# EAGLE board DeviceDIn24 (EAGLE 5.00)

Size 160 x 100 mm. Coordinates in mm from the lower left corner, seen from the top.
Outline: 0,0 160,0 160,100 0,100 0,0
Copper layers (1*16): Top 0.035mm / dielectric 1.5mm / Bottom 0.035mm
Design rules "default": minimum track width 10mil, minimum drill 24mil, track to track 8mil, track to pad 8mil, pad to pad 8mil, via to via 8mil, smd to smd 8mil, copper to edge 40mil, drill to drill 8mil, minimum pad ring 10mil, minimum via ring 8mil, stop-mask expansion 4mil, vias tented up to drill 0mil, thermal gap 10mil

## Footprints (pad centres in the part's own frame; a part is rotated, then mirrored left to right if it is on the bottom)
C2.5-2 = drill 0.813 pad 1.6 octagon: 1 -1.27,0; 2 1.27,0
DIL40 = drill 0.813 long: 1 -24.13,-7.62; 2 -21.59,-7.62; 3 -19.05,-7.62; 4 -16.51,-7.62; 5 -13.97,-7.62; 6 -11.43,-7.62; 7 -8.89,-7.62; 8 -6.35,-7.62; 9 -3.81,-7.62; 10 -1.27,-7.62; 11 1.27,-7.62; 12 3.81,-7.62; 13 6.35,-7.62; 14 8.89,-7.62; 15 11.43,-7.62; 16 13.97,-7.62; 17 16.51,-7.62; 18 19.05,-7.62; 19 21.59,-7.62; 20 24.13,-7.62; 21 24.13,7.62; 22 21.59,7.62; 23 19.05,7.62; 24 16.51,7.62; 25 13.97,7.62; 26 11.43,7.62; 27 8.89,7.62; 28 6.35,7.62; 29 3.81,7.62; 30 1.27,7.62; 31 -1.27,7.62; 32 -3.81,7.62; 33 -6.35,7.62; 34 -8.89,7.62; 35 -11.43,7.62; 36 -13.97,7.62; 37 -16.51,7.62; 38 -19.05,7.62; 39 -21.59,7.62; 40 -24.13,7.62
DIL8 = drill 0.813 long: 1 -3.81,-3.81; 2 -1.27,-3.81; 3 1.27,-3.81; 4 3.81,-3.81; 5 3.81,3.81; 6 1.27,3.81; 7 -1.27,3.81; 8 -3.81,3.81
215876-6 = drill 0.889 round: 1 -1.905,6.35; 2 -0.635,8.89; 3 0.635,6.35; 4 1.905,8.89 | hole 3.251: -5.08,0; 5.08,0
LED3MM = drill 0.813 octagon: A -1.27,0; K 1.27,0
2,15/1,0 = drill 1.016 pad 2.159 octagon: 1 0,0
HC49U70 = drill 0.813 round: 1 -2.413,0; 2 2.413,0
0204V = drill 0.813 octagon: 1 -1.27,0; 2 1.27,0
0204/5 = drill 0.813 octagon: 1 -2.54,0; 2 2.54,0
MOLEX-1X6 = drill 1.016 pad 1.88 square: 1 0,0 | drill 1.016 pad 1.88 round: 2 2.54,0; 3 5.08,0; 4 7.62,0; 5 10.16,0; 6 12.7,0
DIL18 = drill 0.813 long: 1 -10.16,-3.81; 2 -7.62,-3.81; 3 -5.08,-3.81; 4 -2.54,-3.81; 5 0,-3.81; 6 2.54,-3.81; 7 5.08,-3.81; 8 7.62,-3.81; 9 10.16,-3.81; 10 10.16,3.81; 11 7.62,3.81; 12 5.08,3.81; 13 2.54,3.81; 14 0,3.81; 15 -2.54,3.81; 16 -5.08,3.81; 17 -7.62,3.81; 18 -10.16,3.81

## Placement (x,y rotation side)
C1  [C2.5-2]  -70.49,53.81 0 top  (outside the outline)
C2  [C2.5-2]  -75.57,53.81 0 top  (outside the outline)
IC1  PIC16F874P  [DIL40]  -38.74,10.63 0 top  (outside the outline)
IC2  PIC12F629P  [DIL8]  -20.96,27.14 0 top  (outside the outline)
J1  [215876-6]  -36.2,28.41 0 top  (outside the outline)
LED1  [LED3MM]  -19.69,67.78 0 top  (outside the outline)
LED2  [LED3MM]  -29.85,67.78 0 top  (outside the outline)
PAD1  [2,15/1,0]  -61.6,76.67 0 top  (outside the outline)
PAD2  [2,15/1,0]  -67.95,76.67 0 top  (outside the outline)
PAD3  [2,15/1,0]  -74.3,76.67 0 top  (outside the outline)
PAD4  [2,15/1,0]  -17.15,81.75 0 top  (outside the outline)
PAD5  [2,15/1,0]  -23.5,81.75 0 top  (outside the outline)
PAD6  [2,15/1,0]  -29.85,81.75 0 top  (outside the outline)
PAD7  [2,15/1,0]  -36.2,81.75 0 top  (outside the outline)
PAD8  [2,15/1,0]  -42.55,81.75 0 top  (outside the outline)
PAD9  [2,15/1,0]  -48.9,81.75 0 top  (outside the outline)
PAD10  [2,15/1,0]  -37.47,66.51 0 top  (outside the outline)
PAD11  [2,15/1,0]  -55.25,76.67 0 top  (outside the outline)
PAD12  [2,15/1,0]  -45.09,66.51 0 top  (outside the outline)
PAD13  [2,15/1,0]  -52.71,66.51 0 top  (outside the outline)
PAD14  [2,15/1,0]  -60.33,66.51 0 top  (outside the outline)
PAD15  [2,15/1,0]  -22.23,-144.31 0 top  (outside the outline)
PAD16  [2,15/1,0]  -22.23,-188.76 0 top  (outside the outline)
PAD17  [2,15/1,0]  -48.9,-193.84 0 top  (outside the outline)
PAD18  [2,15/1,0]  -41.28,-193.84 0 top  (outside the outline)
PAD19  [2,15/1,0]  -33.66,-193.84 0 top  (outside the outline)
PAD20  [2,15/1,0]  -26.04,-193.84 0 top  (outside the outline)
PAD21  [2,15/1,0]  -48.9,-198.92 0 top  (outside the outline)
PAD30  [2,15/1,0]  -48.9,-149.39 0 top  (outside the outline)
PAD31  [2,15/1,0]  -41.28,-149.39 0 top  (outside the outline)
PAD32  [2,15/1,0]  -33.66,-149.39 0 top  (outside the outline)
PAD33  [2,15/1,0]  -26.04,-149.39 0 top  (outside the outline)
PAD34  [2,15/1,0]  -18.42,-149.39 0 top  (outside the outline)
PAD35  [2,15/1,0]  -48.9,-154.47 0 top  (outside the outline)
PAD36  [2,15/1,0]  -41.28,-154.47 0 top  (outside the outline)
Q1  [HC49U70]  -45.09,56.35 0 top  (outside the outline)
R1  [0204V]  -53.98,81.75 0 top  (outside the outline)
R2  [0204/5]  -65.41,81.75 0 top  (outside the outline)
R3  [0204/5]  -73.03,81.75 0 top  (outside the outline)
R4  [0204/5]  -73.03,-3.34 0 top  (outside the outline)
R5  [0204V]  -59.06,81.75 0 top  (outside the outline)
R6  [0204/5]  -73.03,-8.42 0 top  (outside the outline)
R7  [0204/5]  -73.03,-13.5 0 top  (outside the outline)
R8  [0204/5]  -73.03,-18.58 0 top  (outside the outline)
R9  [0204/5]  -73.03,-23.66 0 top  (outside the outline)
R10  [0204/5]  -73.03,-28.74 0 top  (outside the outline)
R11  [0204/5]  -73.03,-33.82 0 top  (outside the outline)
R12  [0204/5]  -73.03,-38.9 0 top  (outside the outline)
R13  [0204/5]  -64.14,-43.98 0 top  (outside the outline)
R14  [0204/5]  -55.25,-43.98 0 top  (outside the outline)
R15  [0204/5]  -64.14,-49.06 0 top  (outside the outline)
R16  [0204/5]  -55.25,-49.06 0 top  (outside the outline)
R17  [0204/5]  -64.14,-54.14 0 top  (outside the outline)
R18  [0204/5]  -55.25,-54.14 0 top  (outside the outline)
R19  [0204/5]  -64.14,-59.22 0 top  (outside the outline)
R20  [0204/5]  -55.25,-59.22 0 top  (outside the outline)
R21  [0204/5]  -64.14,-64.3 0 top  (outside the outline)
R22  [0204/5]  -55.25,-64.3 0 top  (outside the outline)
R23  [0204/5]  -64.14,-69.38 0 top  (outside the outline)
R24  [0204/5]  -55.25,-69.38 0 top  (outside the outline)
R25  [0204/5]  -64.14,-74.46 0 top  (outside the outline)
R26  [0204/5]  -64.14,-84.62 0 top  (outside the outline)
R27  [0204/5]  -64.14,-89.7 0 top  (outside the outline)
R28  [0204/5]  -55.25,-79.54 0 top  (outside the outline)
R29  [0204/5]  -64.14,-94.78 0 top  (outside the outline)
R30  [0204/5]  -64.14,-99.86 0 top  (outside the outline)
R31  [0204/5]  -64.14,-104.94 0 top  (outside the outline)
R32  [0204/5]  -64.14,-110.02 0 top  (outside the outline)
R33  [0204/5]  -20.96,-115.1 0 top  (outside the outline)
R34  [0204/5]  -47.63,-129.07 0 top  (outside the outline)
R35  [0204/5]  -38.74,-129.07 0 top  (outside the outline)
R36  [0204/5]  -29.85,-129.07 0 top  (outside the outline)
R37  [0204/5]  -20.96,-129.07 0 top  (outside the outline)
R38  [0204/5]  -47.63,-134.15 0 top  (outside the outline)
R39  [0204/5]  -38.74,-134.15 0 top  (outside the outline)
R40  [0204/5]  -29.85,-134.15 0 top  (outside the outline)
R41  [0204/5]  -20.96,-134.15 0 top  (outside the outline)
R42  [0204/5]  -47.63,-139.23 0 top  (outside the outline)
R43  [0204/5]  -38.74,-139.23 0 top  (outside the outline)
R44  [0204/5]  -29.85,-139.23 0 top  (outside the outline)
R45  [0204/5]  -20.96,-139.23 0 top  (outside the outline)
R46  [0204/5]  -47.63,-144.31 0 top  (outside the outline)
R47  [0204/5]  -38.74,-144.31 0 top  (outside the outline)
R48  [0204/5]  -29.85,-144.31 0 top  (outside the outline)
R49  [0204/5]  -47.63,-173.52 0 top  (outside the outline)
R50  [0204/5]  -38.74,-173.52 0 top  (outside the outline)
R51  [0204/5]  -29.85,-173.52 0 top  (outside the outline)
R52  [0204/5]  -47.63,-178.6 0 top  (outside the outline)
R53  [0204/5]  -38.74,-178.6 0 top  (outside the outline)
R54  [0204/5]  -29.85,-178.6 0 top  (outside the outline)
R55  [0204/5]  -47.63,-183.68 0 top  (outside the outline)
R56  [0204/5]  -38.74,-183.68 0 top  (outside the outline)
R57  [0204/5]  -29.85,-183.68 0 top  (outside the outline)
R58  [0204/5]  -47.63,-188.76 0 top  (outside the outline)
R59  [0204/5]  -38.74,-188.76 0 top  (outside the outline)
R60  [0204/5]  -29.85,-188.76 0 top  (outside the outline)
U$3  PIC-ICSPPTH  [MOLEX-1X6]  -65.41,55.08 0 top  (outside the outline)
ULN1  [DIL18]  -37.47,-118.91 0 top  (outside the outline)
ULN2  [DIL18]  -37.47,-163.36 0 top  (outside the outline)
ULN3  [DIL18]  -50.17,46.19 0 top  (outside the outline)
ULN4  [DIL18]  -24.77,58.89 0 top  (outside the outline)

## Library data of the parts
C1 C2 = capacitor-wima
IC1 IC2 = microchip
J1 = con-amp
LED1 LED2 = led
PAD1-PAD21 PAD30-PAD36 = wirepad
Q1 = crystal
R1-R60 = resistor
U$3 ULN1-ULN4 = SparkFun

## Nets
5V: IC1.32 IC2.1 J1.3 R1.2 R2.2 R4.2 R5.2 R6.2 R7.2 R8.2 R9.2 R10.2 R11.2 R12.2 R13.2 R14.2 R15.2 R16.2 R17.2 R18.2 R19.2 R20.2 R21.2 R22.2 R23.2 R24.2 R25.2 R26.2 R27.2 R28.2 R29.2 R30.2 R31.2 R32.2 R33.2 R34.2 R35.2 R36.2 R37.2 R38.2 R39.2 R40.2 R41.2 R42.2 R43.2 R44.2 R45.2 R46.2 R47.2 R48.2 R49.2 R50.2 R51.2 R52.2 R53.2 R54.2 R55.2 R56.2 R57.2 R58.2 R59.2 R60.2 U$3.5 ULN2.10 ULN3.10 ULN4.10
GND: C1.1 C2.1 IC1.12 IC1.31 IC2.8 J1.1 R3.1 U$3.4 ULN2.9 ULN3.9 ULN4.9
N$1: IC1.1 U$3.6
N$2: IC1.28 R54.1 ULN2.18
N$3: IC1.2 R12.1 ULN3.18
N$4: IC1.3 R4.1 ULN3.17
N$5: C1.2 IC1.13 Q1.2
N$6: C2.2 IC1.14 Q1.1
N$7: IC1.26 IC2.6
N$8: IC1.4 R6.1 ULN3.16
N$9: IC1.5 R7.1 ULN3.15
N$10: IC1.27 R49.1 ULN2.17
N$11: IC1.6 R8.1 ULN3.14
N$12: IC1.7 R9.1 ULN3.13
N$13: IC1.8 R10.1 ULN3.12
N$14: IC1.9 R11.1 ULN3.11
N$15: IC1.30 LED2.K
N$16: IC1.15 R28.1 ULN4.18
N$17: PAD1.1 R20.1 ULN3.1
N$18: PAD2.1 R13.1 ULN3.2
N$19: PAD3.1 R14.1 ULN3.3
N$20: PAD4.1 R15.1 ULN3.4
N$21: PAD5.1 R16.1 ULN3.5
N$22: PAD6.1 R17.1 ULN3.6
N$23: PAD7.1 R18.1 ULN3.7
N$24: PAD8.1 R19.1 ULN3.8
N$25: IC1.16 R21.1 ULN4.17
N$26: IC1.17 R22.1 ULN4.16
N$27: IC1.18 R23.1 ULN4.15
N$28: IC1.19 R24.1 ULN4.14
N$29: PAD9.1 R31.1 ULN4.1
N$30: IC1.20 R25.1 ULN4.13
N$31: PAD10.1 R30.1 ULN4.2
N$32: PAD11.1 R29.1 ULN4.3
N$33: PAD12.1 R27.1 ULN4.4
N$34: LED2.A R1.1
N$35: LED1.A R5.1
N$36: PAD13.1 R26.1 ULN4.5
N$37: PAD14.1 R32.1 ULN4.6
N$38: IC1.40 R40.1 U$3.3 ULN1.18
N$39: IC1.39 R33.1 U$3.2 ULN1.17
N$40: IC1.38 R34.1 ULN1.16
N$41: IC1.37 R35.1 ULN1.15
N$42: IC1.36 R36.1 ULN1.14
N$43: IC1.35 R37.1 ULN1.13
N$44: IC1.34 R38.1 ULN1.12
N$45: IC1.33 R39.1 ULN1.11
N$46: PAD15.1 R48.1 ULN1.1
N$47: PAD30.1 R41.1 ULN1.2
N$48: PAD31.1 R42.1 ULN1.3
N$49: PAD32.1 R43.1 ULN1.4
N$50: PAD33.1 R44.1 ULN1.5
N$51: PAD34.1 R45.1 ULN1.6
N$52: PAD35.1 R46.1 ULN1.7
N$53: PAD36.1 R47.1 ULN1.8
N$54: IC1.24 R50.1 ULN2.16
N$55: IC1.23 R51.1 ULN2.15
N$56: IC1.22 R52.1 ULN2.14
N$57: IC1.21 R53.1 ULN2.13
N$58: PAD16.1 R59.1 ULN2.1
N$59: PAD17.1 R58.1 ULN2.2
N$60: PAD18.1 R57.1 ULN2.3
N$61: PAD19.1 R56.1 ULN2.4
N$62: PAD20.1 R55.1 ULN2.5
N$63: PAD21.1 R60.1 ULN2.6
N$67: IC1.29 LED1.K
N$68: IC2.3 J1.2 R2.1
N$69: IC2.2 J1.4 R3.2
N$71: IC1.10 IC2.7
N$73: IC1.25 IC2.5
VDD: IC1.11

## Tracks (layer width: path | path; a pad name or v marks a point on that pad's centre or on a via)
5V  (65 unrouted)
GND  (10 unrouted)
N$1  (1 unrouted)
N$2  (2 unrouted)
N$3  (2 unrouted)
N$4  (2 unrouted)
N$5  (2 unrouted)
N$6  (2 unrouted)
N$7  (1 unrouted)
N$8  (2 unrouted)
N$9  (2 unrouted)
N$10  (2 unrouted)
N$11  (2 unrouted)
N$12  (2 unrouted)
N$13  (2 unrouted)
N$14  (2 unrouted)
N$15  (1 unrouted)
N$16  (2 unrouted)
N$17  (2 unrouted)
N$18  (2 unrouted)
N$19  (2 unrouted)
N$20  (2 unrouted)
N$21  (2 unrouted)
N$22  (2 unrouted)
N$23  (2 unrouted)
N$24  (2 unrouted)
N$25  (2 unrouted)
N$26  (2 unrouted)
N$27  (2 unrouted)
N$28  (2 unrouted)
N$29  (2 unrouted)
N$30  (2 unrouted)
N$31  (2 unrouted)
N$32  (2 unrouted)
N$33  (2 unrouted)
N$34  (1 unrouted)
N$35  (1 unrouted)
N$36  (2 unrouted)
N$37  (2 unrouted)
N$38  (3 unrouted)
N$39  (3 unrouted)
N$40  (2 unrouted)
N$41  (2 unrouted)
N$42  (2 unrouted)
N$43  (2 unrouted)
N$44  (2 unrouted)
N$45  (2 unrouted)
N$46  (2 unrouted)
N$47  (2 unrouted)
N$48  (2 unrouted)
N$49  (2 unrouted)
N$50  (2 unrouted)
N$51  (2 unrouted)
N$52  (2 unrouted)
N$53  (2 unrouted)
N$54  (2 unrouted)
N$55  (2 unrouted)
N$56  (2 unrouted)
N$57  (2 unrouted)
N$58  (2 unrouted)
N$59  (2 unrouted)
N$60  (2 unrouted)
N$61  (2 unrouted)
N$62  (2 unrouted)
N$63  (2 unrouted)
N$67  (1 unrouted)
N$68  (2 unrouted)
N$69  (2 unrouted)
N$71  (1 unrouted)
N$73  (1 unrouted)